# Altium PCB Cube_Mainboard.PcbDoc
Units mm, origin at the board's own origin, x right, y up, seen from the top; angles counter-clockwise.
Board outline 119.89 x 137.16 mm, 2 copper layers (Top Layer, Bottom Layer); 85 components, 135 nets, 378 pads, 9 vias.
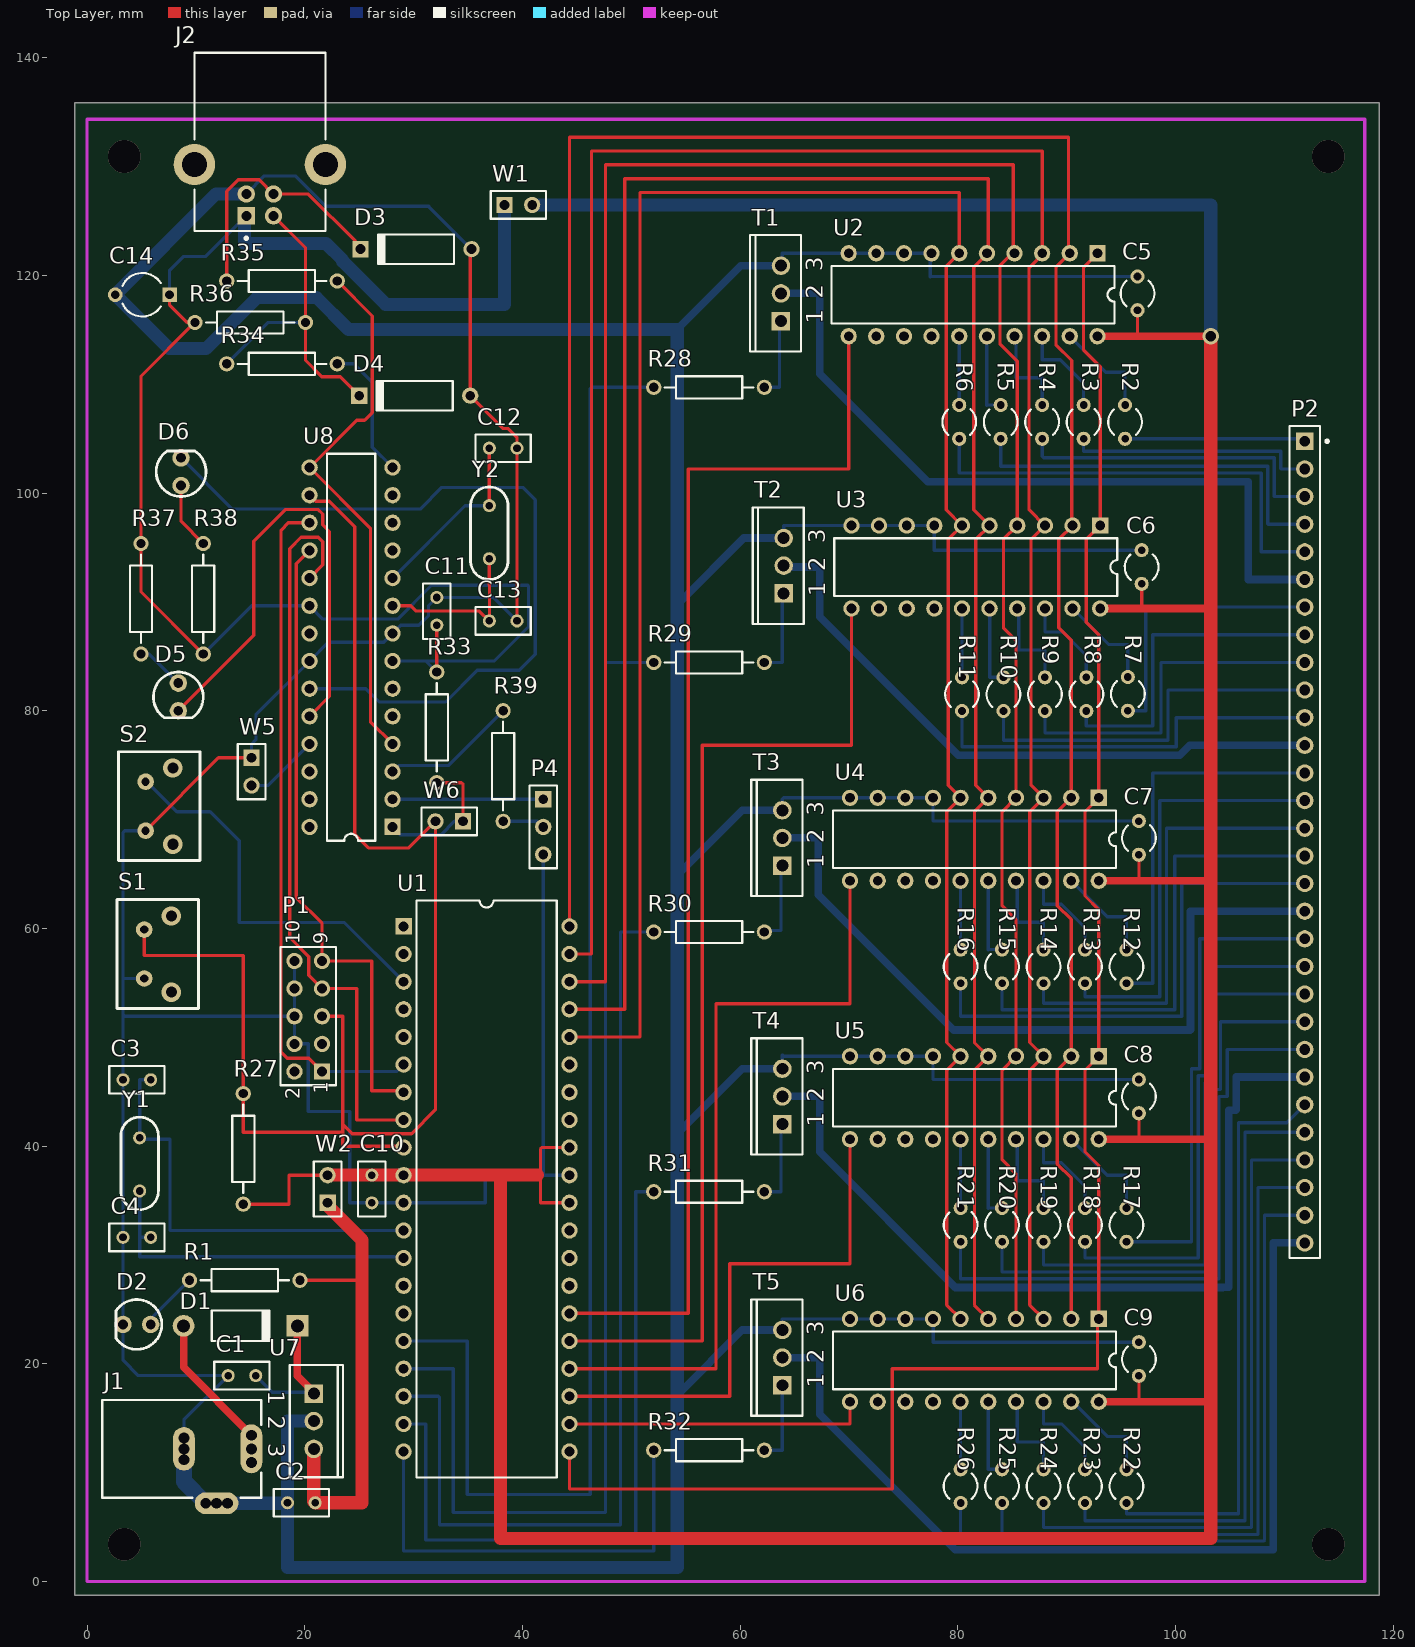
[diagram p0: Top Layer view]
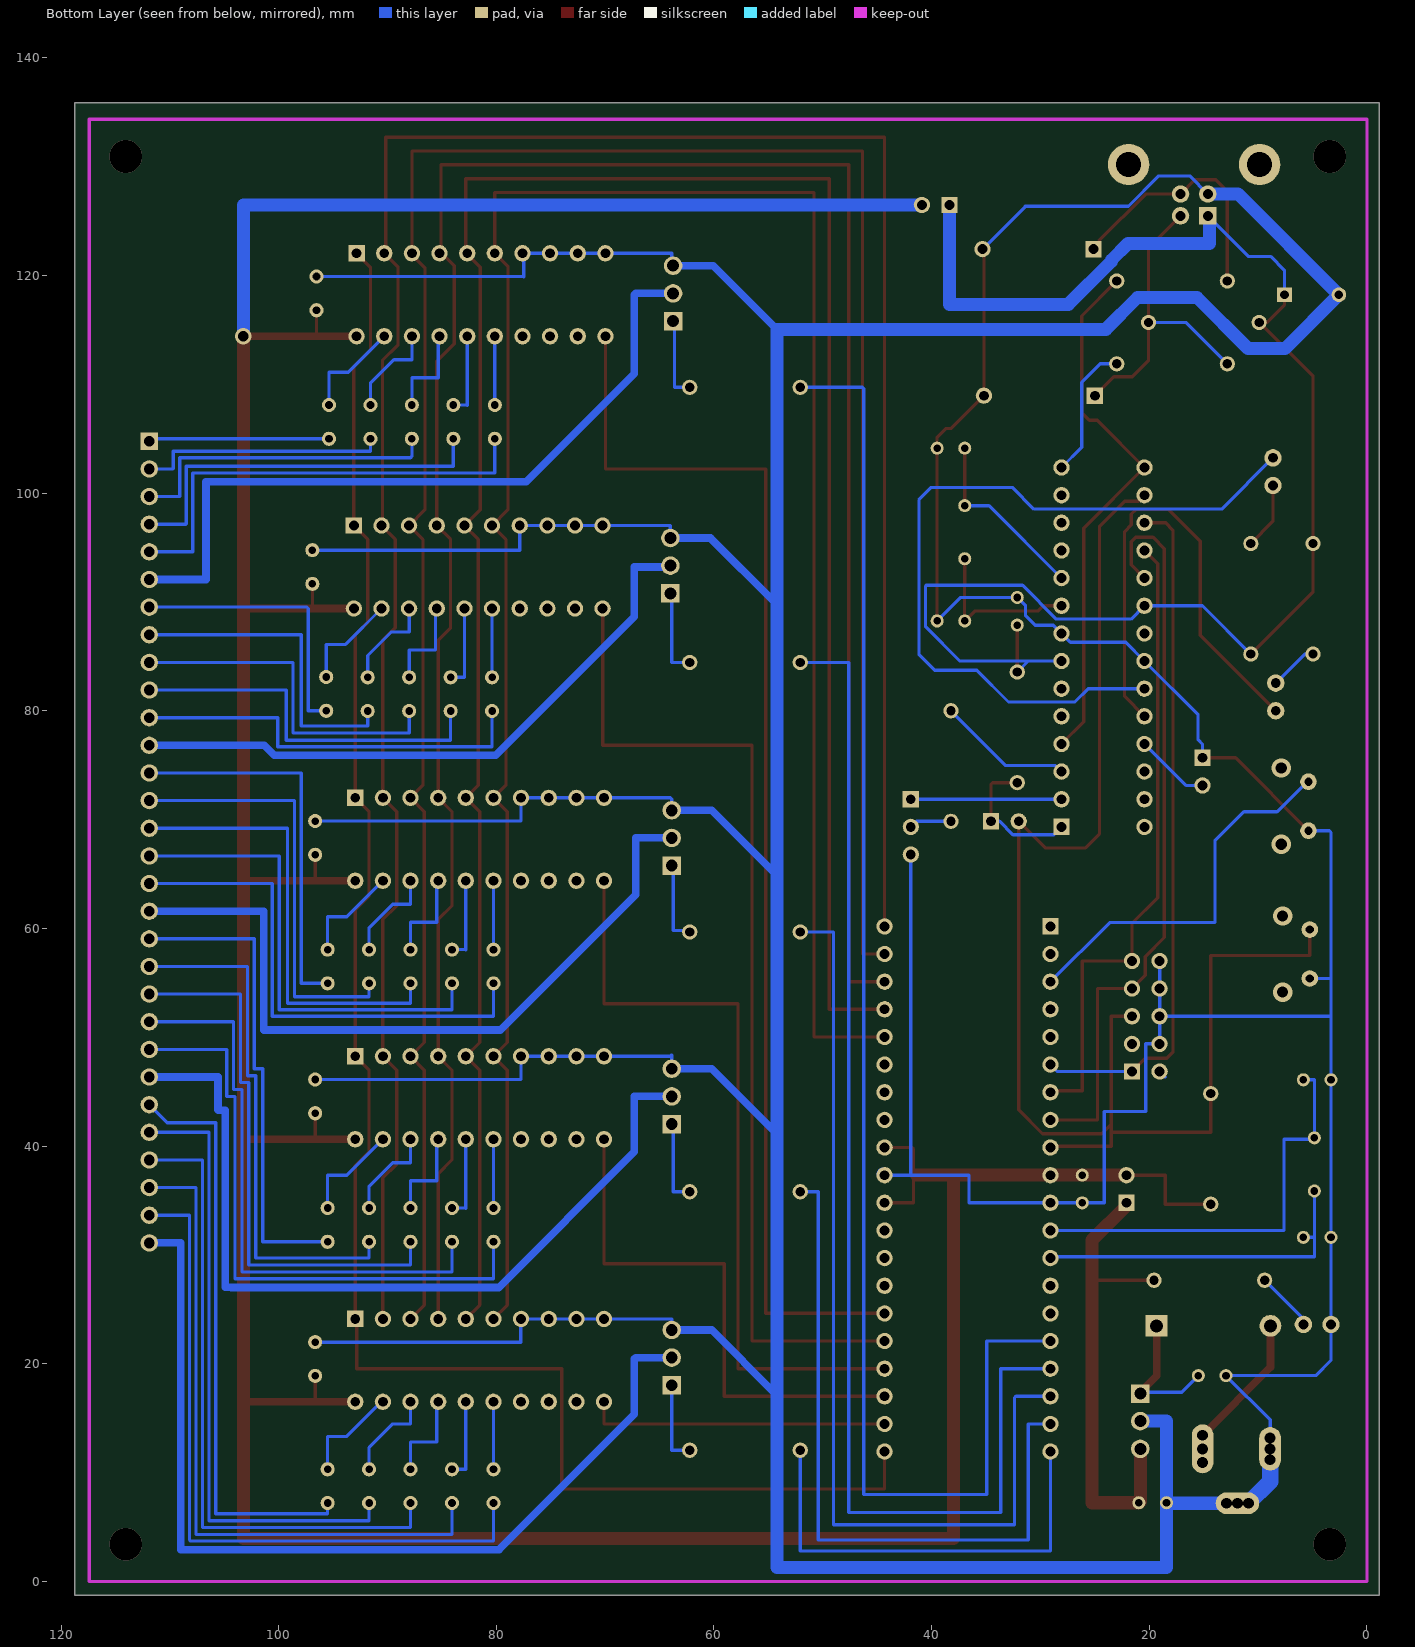
[diagram p1: Bottom Layer view, seen from below]

## Layer stack, top to bottom
Top Layer: signal copper 0.0356
Dielectric: dielectric 0.32, FR-4, Dk 4.8
Bottom Layer: signal copper 0.0356

## Board outline
-1.143,-1.27 -1.143,135.89 118.745,135.89 118.745,-1.27

## Design rules (kind name [scope] priority, off if disabled: settings)
Clearance [All] p1: gap=0.3
PolygonConnect [All] p1: connectstyle=Relief reliefconductorwidth=0.254 reliefentries=4 polygonreliefangle="90 Angle"
RoutingVias [All] p1: holewidth=0.8 width=1.6 viastyle="Through Hole" minholewidth=0.711 minwidth=1.27 maxholewidth=0.711 maxwidth=1.27
SilkscreenOverComponentPads [All] p1: minsilkscreentomaskgap=0.254
SolderMaskExpansion [All] p1: expansion=0.102
Width [All] p1: maxlimit=1.5 minlimit=0.3 preferedwidth=0.3
27 further rules are at their usual default settings.

## Classes and differential pairs
component class U_LED_Treiber: C5 C6 C7 C8 C9 P2 R2 R3 R4 R5 R6 R7 R8 R9 R10 R11 R12 R13 R14 R15 R16 R17 R18 R19 R20 R21 R22 R23 R24 R25 R26 U2 U3 U4 U5 U6
component class U_LED_GND_ZLayer_switch: R28 R29 R30 R31 R32 T1 T2 T3 T4 T5
component class U_Cube_Controller: C1 C2 C3 C4 C10 D1 D2 J1 P1 R1 R27 S1 S2 U1 U7 W1 W2 Y1
component class U_Cube_Conector: E0 E1 E2 E3 E4
component class U_USB_Programmer: C11 C12 C13 C14 D3 D4 D5 D6 J2 P4 R33 R34 R35 R36 R37 R38 R39 U8 W5 W6 Y2

## Components (designator, comment, footprint, x,y, rotation, side; value= is the part's Value field where it differs from the comment)
C1 "Cap2" RAD-0.1 14.224,18.923 r180 top
C2 "Cap2" RAD-0.1 19.685,7.239 r180 top
C3 "Cap Semi" RAD-0.1 4.572,46.101 r0 top
C4 "Cap Semi" RAD-0.1 4.572,31.623 r0 top
C5 "Cap" R38 96.52,118.364 r0 top
C6 "Cap" R38 96.901,93.218 r0 top
C7 "Cap" R38 96.647,68.326 r0 top
C8 "Cap" R38 96.647,44.577 r0 top
C9 "Cap" R38 96.647,20.447 r0 top
C10 "Cap" RAD-0.1 26.162,36.068 r90 top
C11 "Cap" RAD-0.1 32.131,89.154 r270 top
C12 "Cap" RAD-0.1 38.227,104.14 r180 top
C13 "Cap" RAD-0.1 38.227,88.265 r180 top
C14 "Cap2" CAPR5-4X5 5.08,118.237 r180 top
D1 "Diode 1N4004" DO-41 14.097,23.495 r0 top
D2 "LED" "LED 3mm" 5.842,23.622 r180 top
D3 "3V6" DO-7 30.226,122.428 r180 top
D4 "3V6" DO-7 30.099,108.966 r180 top
D5 "LED" "LED 3mm" 8.382,82.55 r270 top
D6 "LED" "LED 3mm" 8.636,100.711 r90 top
J1 "PWR2.5" KLD-0202 1.397,12.192 r0 top
J2 "4-1437106-7" 1437106 15.875,126.492 r90 top
P1 "Header 5X2" HDR2X5 21.59,46.863 r90 top
P2 "Header 30" HDR1X30 111.887,104.775 r270 top
P4 "Header 3" HDR1X3 41.91,71.882 r270 top
R1 "Res2" AXIAL-0.4 14.478,27.686 r180 top
R2 "Res2" R38 95.377,106.553 r0 top
R3 "Res2" R38 91.567,106.553 r0 top
R4 "Res2" R38 87.757,106.553 r0 top
R5 "Res2" R38 83.947,106.553 r0 top
R6 "Res2" R38 80.137,106.553 r0 top
R7 "Res2" R38 95.631,81.56 r0 top
R8 "Res2" R38 91.821,81.534 r0 top
R9 "Res2" R38 88.011,81.534 r0 top
R10 "Res2" R38 84.201,81.534 r0 top
R11 "Res2" R38 80.391,81.534 r0 top
R12 "Res2" R38 95.504,56.515 r0 top
R13 "Res2" R38 91.694,56.515 r0 top
R14 "Res2" R38 87.884,56.515 r0 top
R15 "Res2" R38 84.074,56.515 r0 top
R16 "Res2" R38 80.264,56.515 r0 top
R17 "Res2" R38 95.504,32.766 r0 top
R18 "Res2" R38 91.694,32.766 r0 top
R19 "Res2" R38 87.884,32.766 r0 top
R20 "Res2" R38 84.074,32.766 r0 top
R21 "Res2" R38 80.264,32.766 r0 top
R22 "Res2" R38 95.504,8.763 r0 top
R23 "Res2" R38 91.694,8.763 r0 top
R24 "Res2" R38 87.884,8.763 r0 top
R25 "Res2" R38 84.074,8.763 r0 top
R26 "Res2" R38 80.264,8.763 r0 top
R27 "Res2" AXIAL-0.4 14.351,39.751 r90 top
R28 "Res2" AXIAL-0.4 57.15,109.728 r0 top
R29 "Res2" AXIAL-0.4 57.15,84.455 r0 top
R30 "Res2" AXIAL-0.4 57.15,59.69 r0 top
R31 "Res2" AXIAL-0.4 57.15,35.814 r0 top
R32 "Res2" AXIAL-0.4 57.15,12.065 r0 top
R33 "Res2" AXIAL-0.4 32.131,78.486 r270 top
R34 "Res2" AXIAL-0.4 17.907,111.887 r180 top
R35 "Res2" AXIAL-0.4 17.907,119.507 r180 top
R36 "Res2" AXIAL-0.4 14.986,115.697 r180 top
R37 "Res2" AXIAL-0.4 4.953,90.297 r90 top
R38 "Res2" AXIAL-0.4 10.668,90.297 r270 top
R39 "Res2" AXIAL-0.4 38.227,74.93 r270 top
S1 "Taster" Taster 7.747,57.658 r0 top
S2 "Taster" Taster 7.874,71.247 r0 top
T1 "BUZ11" TO220 63.754,118.364 r90 top
T2 "BUZ11" TO220 64.008,93.345 r90 top
T3 "BUZ11" TO220 63.881,68.326 r90 top
T4 "BUZ11" TO220 63.881,44.577 r90 top
T5 "BUZ11" TO220 63.881,20.574 r90 top
U1 "ATmega32L-8PI" 40P6 36.703,36.068 r270 top
U2 "M74HC574B1R" DIP20 81.407,118.237 r180 top
U3 "M74HC574B1R" DIP20 81.661,93.218 r180 top
U4 "M74HC574B1R" DIP20 81.534,68.199 r180 top
U5 "M74HC574B1R" DIP20 81.534,44.45 r180 top
U6 "M74HC574B1R" DIP20 81.534,20.32 r180 top
U7 "MC78T05ABT" 221A-04 20.828,14.732 r270 top
U8 "ATmega8L-8PI" 28P3 24.257,85.852 r90 top
W1 "Jumper" HDR1X2 38.354,126.492 r0 top
W2 "Jumper" HDR1X2 22.098,34.798 r90 top
W5 "Jumper" HDR1X2 15.113,75.692 r270 top
W6 "Jumper" HDR1X2 34.544,69.85 r180 top
Y1 "16MHz" "Quarz HC49-4HL" 4.826,40.767 r270 top
Y2 "12MHz" "Quarz HC49-4HL" 36.957,93.98 r90 top

## Footprints (in the part's own frame and the unit in brackets; to place one, negate y for a bottom-side part, rotate by r counter-clockwise, add the part's x,y. Pads: shape width x height; smd on the part's side, far side on the other; paste and mask are expansions set on the pad)
28P3 [mm] "DIP; 28 Leads; Row Spacing 7.62 mm; Pitch 2.54 mm"
  rect 1.5x1.5 hole 0.9: 1(-16.51,-3.81)
  round 1.5 hole 0.9: 2(-13.97,-3.81) 3(-11.43,-3.81) 4(-8.89,-3.81) 5(-6.35,-3.81) 6(-3.81,-3.81) 7(-1.27,-3.81) 8(1.27,-3.81) 9(3.81,-3.81) 10(6.35,-3.81) 11(8.89,-3.81) 12(11.43,-3.81) 13(13.97,-3.81) 14(16.51,-3.81) 15(16.51,3.81) 16(13.97,3.81) 17(11.43,3.81) 18(8.89,3.81) 19(6.35,3.81) 20(3.81,3.81) 21(1.27,3.81) 22(-1.27,3.81) 23(-3.81,3.81) 24(-6.35,3.81) 25(-8.89,3.81) 26(-11.43,3.81) 27(-13.97,3.81) 28(-16.51,3.81)
  silkscreen extent -17.78,-2.22 17.78,2.22
40P6 [mm] "DIP; 40 Leads; Row Spacing 15.24 mm; Pitch 2.54 mm"
  rect 1.5x1.5 hole 0.9: 1(-24.13,-7.62)
  round 1.5 hole 0.9: 2(-21.59,-7.62) 3(-19.05,-7.62) 4(-16.51,-7.62) 5(-13.97,-7.62) 6(-11.43,-7.62) 7(-8.89,-7.62) 8(-6.35,-7.62) 9(-3.81,-7.62) 10(-1.27,-7.62) 11(1.27,-7.62) 12(3.81,-7.62) 13(6.35,-7.62) 14(8.89,-7.62) 15(11.43,-7.62) 16(13.97,-7.62) 17(16.51,-7.62) 18(19.05,-7.62) 19(21.59,-7.62) 20(24.13,-7.62) 21(24.13,7.62) 22(21.59,7.62) 23(19.05,7.62) 24(16.51,7.62) 25(13.97,7.62) 26(11.43,7.62) 27(8.89,7.62) 28(6.35,7.62) 29(3.81,7.62) 30(1.27,7.62) 31(-1.27,7.62) 32(-3.81,7.62) 33(-6.35,7.62) 34(-8.89,7.62) 35(-11.43,7.62) 36(-13.97,7.62) 37(-16.51,7.62) 38(-19.05,7.62) 39(-21.59,7.62) 40(-24.13,7.62)
  silkscreen extent -26.5,-6.45 26.5,6.45
221A-04 [mm] "TO, Thru-Hole, Vertical, Heatsink Mounted; 3 In-Line Leads; Pitch 2.54 mm"
  rect 1.7x1.7 hole 1.1: 1(-2.54,0)
  round 1.7 hole 1.1: 2(0,0) 3(2.54,0)
  silkscreen extent -5.15,-2.2 5.15,2.7
1437106 [mm] "Connector; USB1.1, Type B, Thru-Hole; 4 Position; Right Angle"
  rect 1.6x1.6 hole 0.92: 1(-1,1.25)
  round 1.6 hole 0.92: 2(-1,-1.25) 3(1,-1.25) 4(1,1.25)
  round 3.8 hole 2.3: 5(3.71,6.02) 6(3.71,-6.02)
  silkscreen extent -3.18,-6.02 13.99,6.02
AXIAL-0.4 [mm] "Axial Device, Thru-Hole; 2 Leads; 0.4 in Pin Spacing"
  round 1.4 hole 0.85: 1(-5.08,0) 2(5.08,0)
  silkscreen extent -4.06,-1.02 4.06,1.02
CAPR5-4X5 [mm] "Capacitor; 2 Leads"
  rect 1.35x1.35 hole 0.8: 1(-2.5,0)
  round 1.35 hole 0.8: 2(2.5,0)
  silkscreen extent -1.69,-2 1.82,2
DIP20 [mm] "DIP; 20 Leads; Row Spacing 7.62 mm; Pitch 2.54 mm"
  rect 1.5x1.5 hole 0.9: 1(-11.43,-3.81)
  round 1.5 hole 0.9: 2(-8.89,-3.81) 3(-6.35,-3.81) 4(-3.81,-3.81) 5(-1.27,-3.81) 6(1.27,-3.81) 7(3.81,-3.81) 8(6.35,-3.81) 9(8.89,-3.81) 10(11.43,-3.81) 11(11.43,3.81) 12(8.89,3.81) 13(6.35,3.81) 14(3.81,3.81) 15(1.27,3.81) 16(-1.27,3.81) 17(-3.81,3.81) 18(-6.35,3.81) 19(-8.89,3.81) 20(-11.43,3.81)
  silkscreen extent -13,-2.65 13,2.65
DO-7 [mm] "Diode, Axial; Body 7 x 2.7 mm (LxDia. max), Lead Dia. 0.53 mm (max)"
  round 1.5 hole 0.9: 1(-5.1,0)
  rect 1.5x1.5 hole 0.9: 2(5.1,0)
  silkscreen extent -3.5,-1.35 3.6,1.35
DO-41 [mm] "Diode, Axial; Body 5.2 x 2.7 mm (LxDia. max), Lead Dia. 0.86 mm (max)"
  round 2 hole 1.2: 1(-5.23,0)
  rect 2x2 hole 1.2: 2(5.23,0)
  silkscreen extent -2.65,-1.4 2.75,1.4
HDR1X2 [mm] "Connector; Header; 2 Position"
  rect 1.5x1.5 hole 0.9: 1(0,0)
  round 1.5 hole 0.9: 2(2.54,0)
  silkscreen extent -1.27,-1.27 3.81,1.27
HDR1X3 [mm] "Connector; Header; 3 Position"
  rect 1.5x1.5 hole 0.9: 1(0,0)
  round 1.5 hole 0.9: 2(2.54,0) 3(5.08,0)
  silkscreen extent -1.27,-1.27 6.35,1.27
HDR1X30 [mm] "Connector; Header; 30 Position"
  rect 1.6x1.6 hole 0.99: 1(0,0)
  round 1.6 hole 0.99: 2(2.54,0) 3(5.08,0) 4(7.62,0) 5(10.16,0) 6(12.7,0) 7(15.24,0) 8(17.78,0) 9(20.32,0) 10(22.86,0) 11(25.4,0) 12(27.94,0) 13(30.48,0) 14(33.02,0) 15(35.56,0) 16(38.1,0) 17(40.64,0) 18(43.18,0) 19(45.72,0) 20(48.26,0) 21(50.8,0) 22(53.34,0) 23(55.88,0) 24(58.42,0) 25(60.96,0) 26(63.5,0) 27(66.04,0) 28(68.58,0) 29(71.12,0) 30(73.66,0)
  silkscreen extent -1.4,-1.4 75.06,2.18
HDR2X5 [mm] "Connector; Header; 5x2 Position"
  rect 1.5x1.5 hole 0.9: 1(0,0)
  round 1.5 hole 0.9: 2(0,2.54) 3(2.54,0) 4(2.54,2.54) 5(5.08,0) 6(5.08,2.54) 7(7.62,0) 8(7.62,2.54) 9(10.16,0) 10(10.16,2.54)
  silkscreen extent -1.27,-1.27 11.43,3.81
KLD-0202 [mm] "DC Power Jack, 2.5mm, KLD Series, PCB Mount"
  oval 2x4.5 hole 1: 1(13.7,0)
  round 1.5 hole 1: 1A(13.7,-1.25) 1B(13.7,1.25) 2A(7.5,-1) 2B(7.5,1) 3A(9.5,-5) 3B(11.5,-5)
  oval 2x4 hole 1: 2(7.5,0)
  oval 4x2 hole 1: 3(10.5,-5)
  silkscreen extent 0,-4.5 14.6,4.5
"LED 3mm" [mm]
  round 1.6 hole 0.9: 1(0,0) 2(2.54,0)
  silkscreen extent -1.02,-2.29 3.18,2.29
"Quarz HC49-4HL" [mm]
  round 1.2 hole 0.7: 1(0,0) 2(4.88,0)
  silkscreen extent -1.9,-1.72 6.6,1.72
R38 [mm] "Crystal, Thru-Hole; 2 Leads; Body 3.1 x 8.2 mm (Dia.xH)"
  round 1.3 hole 0.7: 1(0,1.55) 2(0,-1.55)
  silkscreen extent -1.55,-1.19 1.55,1.17
RAD-0.1 [mm] "Radial Cap, Thru-Hole; 2 Leads; 0.1 in Pin Spacing"
  round 1.2 hole 0.7: 1(-1.27,0) 2(1.27,0)
  silkscreen extent -2.54,-1.27 2.54,1.27
Taster [mil]
  round 60 hole 30: 1(-98.43,88.58) 2(-98.43,-88.58)
  silkscreen extent -197,-197 98,197
TO220 [mm] "TO, Thru-Hole, Vertical, Heatsink Mounted; 3 In-Line Leads; Pitch 2.54 mm"
  rect 1.7x1.7 hole 1.1: 1(-2.54,0)
  round 1.7 hole 1.1: 2(0,0) 3(2.54,0)
  silkscreen extent -5.35,-1.85 5.35,2.85

## Part data
C1 C2 C5 C6 C7 C8 C9 C10 C11 C12 C13 C14: "Capacitor"
C3 C4: "Capacitor (Semiconductor SIM Model)"
D1: "1 Amp General Purpose Rectifier"
D2 D5 D6: library part "LED Std", "LED bedrahtet"
D3 D4: library part "D Zener", "Zener Diode"
J1: "Low Voltage Power Supply Connector"
J2: "USB 1.1, Right Angle, Thru-Hole, B Type, Receptacle, 4 Position, White"
P1: "Header, 5-Pin, Dual row"
P2: "Header, 30-Pin"
P4: "Header, 3-Pin"
R1 R2 R3 R4 R5 R6 R7 R8 R9 R10 R11 R12 R13 R14 R15 R16 R17 R18 R19 R20 R21 R22 R23 R24 R25 R26 R27 R28 R29 R30 R31 R32 R33 R34 R35 R36 R37 R38 R39: "Resistor"
T1 T2 T3 T4 T5: library part N-MOSFET, "MOSFET"
U1: "8-Bit AVR Microcontroller with 32K Bytes of In-System Programmable Flash Memory"
U2 U3 U4 U5 U6: "Octal D-Type Flip-Flop with 3-State Output Non-Inverting"
U7: "Three-Ampere Positive Fixed Voltage Regulator"
U8: "8-Bit AVR Microcontroller with 8K Bytes of In-System Programmable Flash Memory"
W1 W2 W5 W6: "Jumper Wire"
Y1 Y2: library part "Quarz HC49-4HL"

## Via types
v1: diameter 3, hole 3, Top Layer to Bottom Layer, 4 vias
v2: diameter 1.778, hole 1.016, Top Layer to Bottom Layer, 4 vias
v3: diameter 1.5, hole 1, Top Layer to Bottom Layer, 1 vias

## Nets (pads, with @x,y where several pads share a name; then routed paths per layer and width w, separated by ;. In a path a pad name is that pad's centre, name@x,y a point inside that pad or via, vN(x,y) a via of type N, cw(c..) or ccw(c..) an arc to the next point about the centre after c; other vN are vias at no path point)
+5: C2.1 R1.1 U7.3 W2.1 | length 44
  Top Layer w0.3: R1.1 25.146,27.686 25.273,27.813
  Top Layer w1.2: U7.3 20.828,7.366 C2.1 25.273,7.239 25.273,27.813 25.273,31.369 22.098,34.544 W2.1
+5P: C11.2 C14.1 J2.1 R33.1 R36.2 R37.2 R38.2 U8.7 U8.20 W1.1 | length 144.9
  Top Layer w0.3: C14.1 7.58,117.29 9.173,115.697 R36.2 4.953,110.744 R37.2 4.953,90.932 R38.2 ; R33.1 C11.2
  Bottom Layer w0.3: C14.1 7.58,120.483 8.86,121.763 10.896,121.763 14.478,125.345 J2.1 ; R38.2 15.113,89.662 U8.20 21.671,88.438 28.545,88.438 31.644,91.537 40.483,91.537 40.559,91.461 40.559,87.727 37.414,84.582 31.115,84.582 ; U8.7 31.115,84.582 ; R33.1 31.115,84.582
  Bottom Layer w1.2: J2.1@14.478,125.345 14.478,122.936 21.971,122.936 23.476,121.431 23.476,121.305 27.433,117.348 38.354,117.348 W1.1
GND: C1.2 C2.2 C3.1 C4.1 C5.1 C6.1 C7.1 C8.1 C9.1 C10.1 C11.1 C12.1 C13.1 C14.2 D2.2 D3.1 D4.1 J1.2 J1.2A J1.2B J1.3 J1.3A J1.3B J2.4 P1.4 P1.6 P1.8 P1.10 P4.3 S1.2 S2.2 T1.3 T2.3 T3.3 T4.3 T5.3 U1.11 U1.31 U2.7 U2.8 U2.9 U2.10 U3.7 U3.8 U3.9 U3.10 U4.7 U4.8 U4.9 U4.10 U5.7 U5.8 U5.9 U5.10 U6.7 U6.8 U6.9 U6.10 U7.2 U8.8 U8.22 W5.1 | length 763.2
  Top Layer w0.3: S2.2 12.069,75.692 W5.1 ; D3.1@35.199,122.174 D4.1 38.226,105.939 38.705,105.939 39.497,105.147 C12.1 C13.1
  Bottom Layer w0.3: S1.2 3.393,55.408 3.302,55.499 ; S2.2 3.465,68.997 3.302,68.834 3.302,55.499 ; J1.2A J1.2 J1.2B 8.897,14.866 C1.2 4.699,18.923 3.302,20.32 D2.2 C4.1 C3.1 3.302,52.07 ; J2.4 16.287,129.154 19.122,129.154 21.911,126.365 31.389,126.365 ; W5.1 15.113,76.932 15.515,77.334 15.515,79.65 U8.22 22.17,86.305 27.25,86.305 U8.8 28.807,87.862 30.481,87.862 31.369,88.75 31.369,89.662 C11.1 37.338,90.424 C13.1 ; P1.10 P1.8 P1.6 ; 31.443,126.291 D3.1@35.316,122.418 ; P4.3 41.91,37.338 ; U1.31 41.91,37.338 ; T1.3 63.881,121.031 63.881,122.047 U2.10 U2.9 U2.8 U2.7 77.47,121.92 77.47,119.888 77.496,119.914 C5.1 ; T5.3 63.881,24.13 U6.10 U6.9 U6.8 U6.7 ; T4.3 63.881,48.387 64.008,48.26 U5.10 U5.9 U5.8 U5.7 77.724,46.127 C8.1 ; T3.3 63.881,71.882 64.008,72.009 U4.10 U4.9 U4.8 U4.7 77.724,69.876 C7.1 ; T2.3 64.008,97.028 U3.10 U3.9 U3.8 U3.7 77.851,94.742 77.877,94.768 C6.1 ; U6.7@77.75,24.156 77.75,21.997 C9.1 ; 3.302,52.07 3.429,51.943 P1.6 ; 3.302,52.07 3.302,55.499 ; P1.6 P1.4 20.32,49.403 20.32,43.18 24.13,43.18 24.13,34.798 C10.1 U1.11 36.576,34.798 36.576,37.338 41.91,37.338
  Bottom Layer w0.7: 54.229,115.062 60.071,120.904 T1.3 ; 54.356,17.272 60.198,23.114 T5.3 ; 54.356,41.275 60.198,47.117 T4.3 ; 54.356,65.024 60.198,70.866 T3.3 ; 54.483,90.043 60.325,95.885 T2.3
  Bottom Layer w1.2: J1.3B C2.2@18.415,7.192 ; J2.4 11.835,127.492 C14.2 7.533,113.284 10.922,113.284 15.621,117.983 21.082,117.983 24.003,115.062 54.229,115.062 54.229,1.27 18.415,1.27 C2.2@18.415,7.192 ; U7.2 18.415,14.732 C2.2 C2.2@18.415,7.192 ; U1.31 U1.31@44.45,37.465
  Bottom Layer w1.5: J1.2A 8.897,9.192 J1.3A
Net00_1: 
Net00_2: 
Net01_1: 
Net02_1: 
Net03_1: 
Net04_1: 
Net10_1: 
Net11_1: 
Net12_1: 
Net13_1: 
Net14_1: 
Net20_1: 
Net21_1: 
Net22_1: 
Net23_1: 
Net24_1: 
Net30_1: 
Net31_1: 
Net32_1: 
Net33_1: 
Net34_1: 
Net40_1: 
Net41_1: 
Net42_1: 
Net43_1: 
Net44_1: 
NetC1_1: C1.1 D1.2 U7.1 | length 12.7
  Top Layer w0.7: D1.2 19.327,18.9 U7.1@20.828,17.399
  Bottom Layer w0.3: C1.1 17.018,17.399 U7.1@20.828,17.399
NetC3_2: C3.2 U1.12 Y1.1 | length 39
  Bottom Layer w0.3: C3.2 4.826,46.101 Y1.1 4.953,40.64 7.62,40.64 7.62,32.258 U1.12
NetC4_2: C4.2 U1.13 Y1.2 | length 31.4
  Bottom Layer w0.3: Y1.2 4.826,31.623 ; C4.2 4.826,31.623 ; U1.13 28.956,29.845 4.826,29.845 4.826,31.623
NetC12_2: C12.2 U8.10 Y2.2 | length 16.9
  Top Layer w0.3: Y2.2 36.952,98.865 36.952,104.135 C12.2
  Bottom Layer w0.3: U8.10 34.725,98.86 Y2.2
NetC13_2: C13.2 U8.9 Y2.1 | length 15.2
  Top Layer w0.3: U8.9 29.76,89.662 30.247,89.175 36.047,89.175 C13.2 36.978,88.265 36.978,91.562 36.957,91.583 Y2.1
NetD1_1: D1.1 J1.1 J1.1A J1.1B | length 12.6
  Top Layer w0.7: D1.1 8.867,19.672 J1.1B
NetD2_1: D2.1 R1.2 | length 5.5
  Bottom Layer w0.3: D2.1 5.842,24.13 R1.2
NetD3_2: D3.2 J2.3 R35.2 | length 22.8
  Top Layer w0.3: R35.2 12.827,127.732 13.894,128.799 15.818,128.799 J2.3 20.316,127.492 24.628,123.18
NetD4_2: D4.2 J2.2 R34.2 R36.1 | length 29.6
  Top Layer w0.3: J2.2 20.066,122.551 R36.1 20.066,112.208 21.56,110.714 23.251,110.714 D4.2
  Bottom Layer w0.3: R34.2 16.637,115.697 R36.1
NetD5_1: D5.1 R37.1 | length 4.5
  Bottom Layer w0.3: R37.1 5.715,85.217 D5.1
NetD5_2: D5.2 U8.24 | length 45.8
  Top Layer w0.3: D5.2 15.312,86.94 15.312,95.601 18.207,98.497 21.242,98.497 21.647,98.092 21.647,97.089 22.271,96.465 22.271,81.326 U8.24
NetD6_1: D6.1 R38.1 | length 6.2
  Top Layer w0.3: D6.1 8.636,97.409 R38.1
NetD6_2: D6.2 U8.23 | length 73
  Bottom Layer w0.3: D6.2 13.34,98.547 30.602,98.547 32.584,100.529 40.026,100.529 41.169,99.386 41.169,85.187 39.721,83.739 35.86,83.739 32.939,80.818 26.843,80.818 25.619,82.042 U8.23
NetE0_1: 
NetE1_1: 
NetE2_1: 
NetE3_1: 
NetP1_1: P1.1 U1.6 U8.17 | length 63.1
  Top Layer w0.3: U8.17 18.491,97.282 17.826,96.617 17.826,48.636 18.385,48.078 20.375,48.078 P1.1
  Bottom Layer w0.3: P1.1 28.448,46.863 U1.6
NetP1_5: P1.5 R27.2 S1.1 U1.9 U8.16 W6.2 | length 143.1
  Top Layer w0.3: S1.1 5.247,57.531 14.351,57.531 R27.2 14.351,41.275 23.495,41.275 23.495,40.005 28.956,40.005 U1.9 ; U8.16 21.001,99.268 22.247,99.268 24.583,96.932 24.583,68.677 25.853,67.407 29.561,67.407 W6.2 32.004,43.332 29.815,41.143 24.354,41.143 23.495,42.002 ; P1.5 23.495,51.943 23.495,42.002 ; 23.49,50.043 23.49,42.007 23.495,42.002 ; 23.495,41.402 23.495,42.002
NetP1_7: P1.7 U1.8 U8.19 | length 68.7
  Top Layer w0.3: U8.19 21.662,93.417 21.662,95.537 21.242,95.957 19.655,95.957 18.614,94.915 18.614,59.177 20.366,57.425 20.366,55.707 P1.7 24.765,54.483 24.765,42.418 U1.8
NetP1_9: P1.9 U1.7 U8.18 | length 58.7
  Top Layer w0.3: U8.18 19.223,93.518 19.223,62.835 21.59,60.468 P1.9 26.162,57.023 26.162,45.085 28.956,45.085 U1.7
NetP2_1: P2.1 R2.2 | length 16.6
  Bottom Layer w0.3: R2.2 111.659,105.003 P2.1
NetP2_2: P2.2 R3.2 | length 23.1
  Bottom Layer w0.3: R3.2 91.567,103.851 109.693,103.851 109.693,102.27 109.728,102.235 P2.2
NetP2_3: P2.3 R4.2 | length 29.4
  Bottom Layer w0.3: R4.2 87.757,103.378 87.884,103.251 109.093,103.251 109.093,99.695 P2.3
NetP2_4: P2.4 R5.2 | length 35.8
  Bottom Layer w0.3: R5.2 83.947,102.489 108.493,102.489 108.493,97.19 108.528,97.155 P2.4
NetP2_5: P2.5 R6.2 | length 42.1
  Bottom Layer w0.3: R6.2 80.137,101.854 107.893,101.854 107.893,94.615 P2.5
NetP2_6: P2.6 T1.2 | length 68.4
  Bottom Layer w0.7: T1.2 67.183,118.364 67.31,118.237 67.31,110.998 77.254,101.054 106.68,101.054 106.68,92.075 P2.6@111.76,92.075
NetP2_7: P2.7 R7.2 | length 25.7
  Bottom Layer w0.3: R7.2 97.282,80.01 97.282,89.408 97.409,89.535 P2.7
NetP2_8: P2.8 R8.2 | length 29.8
  Bottom Layer w0.3: R8.2 91.821,78.613 97.917,78.613 97.917,86.995 P2.8
NetP2_9: P2.9 R9.2 | length 32.4
  Bottom Layer w0.3: R9.2 88.011,77.978 98.679,77.978 98.679,84.455 P2.9
NetP2_10: P2.10 R10.2 | length 35
  Bottom Layer w0.3: R10.2 84.201,77.308 99.314,77.308 99.314,81.915 P2.10
NetP2_11: P2.11 R11.2 | length 37.4
  Bottom Layer w0.3: R11.2 80.391,76.708 100.076,76.708 100.076,79.375 P2.11
NetP2_12: P2.12 T2.2 | length 58.2
  Bottom Layer w0.7: T2.2 64.135,93.218 67.31,93.218 67.31,88.646 80.048,75.908 100.407,75.908 101.334,76.835 P2.12
NetP2_13: P2.13 R12.2 | length 35.7
  Bottom Layer w0.3: R12.2 97.917,54.965 97.917,74.295 P2.13
NetP2_14: P2.14 R13.2 | length 39.4
  Bottom Layer w0.3: R13.2 91.694,53.743 98.552,53.743 98.552,71.755 P2.14
NetP2_15: P2.15 R14.2 | length 41.9
  Bottom Layer w0.3: R14.2 87.884,53.143 99.187,53.143 99.187,69.215 P2.15
NetP2_16: P2.16 R15.2 | length 44.4
  Bottom Layer w0.3: R15.2 84.074,52.543 99.949,52.543 99.949,66.675 P2.16
NetP2_17: P2.17 R16.2 | length 46.8
  Bottom Layer w0.3: R16.2 80.264,51.943 100.584,51.943 100.584,64.135 P2.17
NetP2_18: P2.18 T3.2 | length 69.3
  Bottom Layer w0.7: T3.2 67.183,68.326 67.183,63.119 79.629,50.673 101.346,50.673 101.384,50.711 101.384,61.595 P2.18
NetP2_19: P2.19 R17.2 | length 44.2
  Bottom Layer w0.3: R17.2 101.473,31.216 101.473,47.117 102.235,47.117 102.235,59.055 P2.19
NetP2_20: P2.20 R18.2 | length 48.5
  Bottom Layer w0.3: R18.2 91.694,29.718 102.108,29.718 102.108,46.482 102.87,46.482 102.87,56.515 P2.20
NetP2_21: P2.21 R19.2 | length 51
  Bottom Layer w0.3: R19.2 87.884,29.083 102.743,29.083 102.743,45.847 103.505,45.847 103.505,53.975 P2.21
NetP2_22: P2.22 R20.2 | length 53.6
  Bottom Layer w0.3: R20.2 84.074,28.448 103.378,28.448 103.378,45.212 104.14,45.212 104.14,51.435 P2.22
NetP2_23: P2.23 R21.2 | length 56.1
  Bottom Layer w0.3: R21.2 80.264,27.813 104.013,27.813 104.013,44.577 104.775,44.577 104.775,48.895 P2.23
NetP2_24: P2.24 T4.2 | length 77.6
  Bottom Layer w0.7: T4.2 67.31,44.577 67.31,39.497 79.794,27.013 104.344,27.013 104.382,27.051 104.902,27.051 104.902,43.307 105.537,43.307 105.575,43.345 105.575,46.355 P2.24
NetP2_25: P2.25 R22.2 | length 54
  Bottom Layer w0.3: R22.2 95.504,6.223 105.791,6.223 105.791,42.164 110.236,42.164 P2.25
NetP2_26: P2.26 R23.2 | length 57.5
  Bottom Layer w0.3: R23.2 91.694,5.588 106.391,5.588 106.391,41.275 P2.26
NetP2_27: P2.27 R24.2 | length 60
  Bottom Layer w0.3: R24.2 87.884,4.953 106.991,4.953 106.991,38.735 P2.27
NetP2_28: P2.28 R25.2 | length 62.6
  Bottom Layer w0.3: R25.2 84.074,4.318 107.569,4.318 107.591,4.34 107.591,36.195 P2.28
NetP2_29: P2.29 R26.2 | length 65
  Bottom Layer w0.3: R26.2 80.264,3.718 108.099,3.718 108.191,3.81 108.191,33.655 P2.29
NetP2_30: P2.30 T5.2 | length 86.5
  Bottom Layer w0.7: T5.2 67.183,20.574 67.31,20.447 67.31,15.367 79.759,2.918 108.43,2.918 108.433,2.921 108.991,2.921 108.991,31.115 P2.30
NetP4_1: P4.1 U8.2 | length 13.8
  Bottom Layer w0.3: U8.2 P4.1
NetP4_2: P4.2 R39.2 | length 3.9
  Bottom Layer w0.3: R39.2 39.649,69.85 39.67,69.871 41.381,69.871 P4.2
NetR2_1: R2.1 U2.19 | length 9.5
  Bottom Layer w0.3: U2.19 93.599,111.125 95.377,111.125 R2.1
NetR3_1: R3.1 U2.18 | length 8.9
  Bottom Layer w0.3: U2.18 87.757,112.268 89.408,112.268 91.567,110.109 R3.1
NetR4_1: R4.1 U2.17 | length 8.8
  Bottom Layer w0.3: U2.17 85.344,114.3 85.344,110.617 87.757,110.617 R4.1
NetR5_1: R5.1 U2.16 | length 7.6
  Bottom Layer w0.3: U2.16 82.677,108.077 82.703,108.103 R5.1
NetR6_1: R6.1 U2.15 | length 6.3
  Bottom Layer w0.3: R6.1 U2.15
NetR7_1: R7.1 U3.19 | length 9.4
  Bottom Layer w0.3: U3.19 93.853,86.106 95.631,86.106 R7.1
NetR8_1: R8.1 U3.18 | length 8.9
  Bottom Layer w0.3: U3.18 88.011,87.249 89.662,87.249 91.821,85.09 R8.1
NetR9_1: R9.1 U3.17 | length 8.8
  Bottom Layer w0.3: U3.17 85.598,89.281 85.598,85.598 88.011,85.598 R9.1
NetR10_1: R10.1 U3.16 | length 7.6
  Bottom Layer w0.3: U3.16 82.931,83.058 82.957,83.084 R10.1
NetR11_1: R11.1 U3.15 | length 6.3
  Bottom Layer w0.3: R11.1 U3.15
NetR12_1: R12.1 U4.19 | length 9.5
  Bottom Layer w0.3: U4.19 93.726,61.087 95.504,61.087 R12.1
NetR13_1: R13.1 U4.18 | length 8.9
  Bottom Layer w0.3: U4.18 87.884,62.23 89.535,62.23 91.694,60.071 R13.1
NetR14_1: R14.1 U4.17 | length 8.8
  Bottom Layer w0.3: U4.17 85.471,64.262 85.471,60.579 87.884,60.579 R14.1
NetR15_1: R15.1 U4.16 | length 7.6
  Bottom Layer w0.3: U4.16 82.804,58.039 82.83,58.065 R15.1
NetR16_1: R16.1 U4.15 | length 6.3
  Bottom Layer w0.3: R16.1 U4.15
NetR17_1: R17.1 U5.19 | length 9.5
  Bottom Layer w0.3: U5.19 93.726,37.338 95.504,37.338 R17.1
NetR18_1: R18.1 U5.18 | length 8.9
  Bottom Layer w0.3: U5.18 87.884,38.481 89.535,38.481 91.694,36.322 R18.1
NetR19_1: R19.1 U5.17 | length 8.8
  Bottom Layer w0.3: U5.17 85.471,40.513 85.471,36.83 87.884,36.83 R19.1
NetR20_1: R20.1 U5.16 | length 7.6
  Bottom Layer w0.3: U5.16 82.804,34.29 82.83,34.316 R20.1
NetR21_1: R21.1 U5.15 | length 6.3
  Bottom Layer w0.3: R21.1 U5.15
NetR22_1: R22.1 U6.19 | length 9.5
  Bottom Layer w0.3: U6.19@90.424,16.637 93.726,13.335 95.504,13.335 R22.1
NetR23_1: R23.1 U6.18 | length 8.7
  Bottom Layer w0.3: U6.18 87.884,14.478 89.535,14.478 91.694,12.319 R23.1
NetR24_1: R24.1 U6.17 | length 8.8
  Bottom Layer w0.3: U6.17@85.344,16.637 85.471,16.51 85.471,12.827 87.884,12.827 R24.1
NetR25_1: R25.1 U6.16 | length 7.5
  Bottom Layer w0.3: U6.16 82.804,10.287 82.83,10.313 R25.1
NetR26_1: R26.1 U6.15 | length 6.2
  Bottom Layer w0.3: R26.1 U6.15
NetR28_1: R28.1 U1.16 | length 138.7
  Bottom Layer w0.3: U1.16 34.925,22.098 34.925,8.001 46.228,8.001 46.228,109.601 46.355,109.728 R28.1
NetR28_2: R28.2 T1.1 | length 7.5
  Bottom Layer w0.3: R28.2 63.627,109.728 T1.1@63.627,115.697
  Bottom Layer w1.2: T1.1@63.627,115.697 T1.1
NetR29_1: R29.1 U1.17 | length 114.3
  Bottom Layer w0.3: U1.17 33.655,19.558 33.655,6.35 47.625,6.35 47.625,84.455 R29.1
NetR29_2: R29.2 T2.1 | length 7.7
  Bottom Layer w0.3: R29.2@62.357,84.455 63.881,84.455 T2.1@63.881,90.678
NetR30_1: R30.1 U1.18 | length 89.2
  Bottom Layer w0.3: U1.18 32.258,17.018 32.385,16.891 32.385,5.207 49.022,5.207 49.022,59.69 R30.1
NetR30_2: R30.2 T3.1 | length 7.4
  Bottom Layer w0.3: R30.2@62.23,59.817 63.754,59.817 T3.1@63.754,65.659
NetR31_1: R31.1 U1.19 | length 65.7
  Bottom Layer w0.3: U1.19 31.115,14.478 31.115,3.81 50.419,3.81 50.419,35.814 R31.1
NetR31_2: R31.2 T4.1 | length 7.6
  Bottom Layer w0.3: R31.2 63.754,35.814 T4.1@63.754,41.91
NetR32_1: R32.1 U1.20 | length 41.4
  Bottom Layer w0.3: U1.20 29.083,2.794 52.07,2.794 R32.1
NetR32_2: R32.2 T5.1 | length 7.5
  Bottom Layer w0.3: R32.2 63.881,12.065 T5.1@63.881,17.907
NetR33_2: R33.2 U8.1 W6.1 | length 13.2
  Top Layer w0.3: R33.2 34.392,73.406 34.544,73.254 W6.1
  Bottom Layer w0.3: U8.1 28.783,68.626 32.533,68.626 33.757,69.85 W6.1
NetR34_1: R34.1 U8.14 | length 12.5
  Bottom Layer w0.3: R34.1 24.502,111.887 26.208,110.181 26.208,104.221 U8.14
NetR35_1: R35.1 U8.4 U8.15 | length 49.8
  Top Layer w0.3: R35.1 26.208,116.286 26.208,107.412 25.497,106.701 24.786,106.701 U8.15 26.03,96.779 26.03,78.999 U8.4
NetR39_1: R39.1 U8.3 | length 12.5
  Bottom Layer w0.3: U8.3 28.621,74.976 33.193,74.976 R39.1
NetS2_1: S2.1 U1.3 | length 35.7
  Bottom Layer w0.3: S2.1 5.497,73.497 8.255,70.739 11.303,70.739 13.97,68.072 13.97,60.549 23.652,60.549 U1.3
NetU1_21: U1.21 U2.1 U3.1 U4.1 U5.1 U6.1 | length 169.8
  Top Layer w0.3: U1.21 44.323,8.509 73.984,8.509 73.984,19.558 92.837,19.558 92.837,24.003 U6.1 92.964,38.227 91.694,39.497 91.694,46.99 U5.1 92.964,61.722 91.694,62.992 91.694,70.739 U4.1 92.964,86.995 91.821,88.138 91.821,95.758 U3.1 93.091,111.633 91.567,113.157 91.567,120.777 U2.1
NetU1_22: U1.22 U6.11 | length 27.8
  Top Layer w0.3: U1.22 70.104,14.478 U6.11
NetU1_23: U1.23 U5.11 | length 49.4
  Top Layer w0.3: U1.23 59.055,17.018 59.055,29.21 70.104,29.21 U5.11
NetU1_24: U1.24 U4.11 | length 70.6
  Top Layer w0.3: U1.24 57.785,19.558 57.785,53.086 70.104,53.086 U4.11
NetU1_25: U1.25 U3.11 | length 93.2
  Top Layer w0.3: U1.25 56.515,22.098 56.515,76.835 70.231,76.835 U3.11
NetU1_26: U1.26 U2.11 | length 115.4
  Top Layer w0.3: U1.26 55.245,24.638 55.245,102.235 69.977,102.235 U2.11
NetU1_36: U1.36 U2.6 U3.6 U4.6 U5.6 U6.6 | length 221.1
  Top Layer w0.3: U1.36 50.8,50.038 50.8,127.635 80.137,127.635 U2.6 78.937,120.847 78.937,98.482 U3.6 79.121,95.758 79.121,73.152 U4.6 78.994,70.739 78.994,49.53 U5.6 78.994,46.99 78.994,25.4 U6.6
NetU1_37: U1.37 U2.5 U3.5 U4.5 U5.5 U6.5 | length 223.8
  Top Layer w0.3: U1.37 49.403,52.578 49.403,128.905 82.804,128.905 82.804,122.174 U2.5 82.677,121.977 81.477,120.777 81.477,98.482 U3.5 81.661,95.758 81.661,73.152 U4.5 81.534,70.739 81.534,49.53 U5.5 81.534,46.99 81.534,25.4 U6.5
NetU1_38: U1.38 U2.4 U3.4 U4.4 U5.4 U6.4 | length 226.4
  Top Layer w0.3: U1.38 47.625,55.118 47.625,130.175 85.09,130.175 85.09,122.174 U2.4 85.02,122.047 83.877,120.904 83.877,113.735 85.471,112.141 U3.4 84.201,95.758 84.201,87.63 85.344,86.487 U4.4 84.074,70.739 84.074,62.103 85.344,60.833 U5.4 84.074,46.99 84.074,38.735 85.344,37.465 U6.4
NetU1_39: U1.39 U2.3 U3.3 U4.3 U5.3 U6.3 | length 228.6
  Top Layer w0.3: U1.39 46.355,57.658 46.355,131.445 87.757,131.445 U2.3 ; U2.3@87.757,121.92 86.557,120.72 86.557,98.482 U3.3 86.741,95.758 86.741,73.152 U4.3 86.614,70.739 86.614,49.53 U5.3 86.614,46.99 86.614,25.4 U6.3
NetU1_40: U1.40 U2.2 U3.2 U4.2 U5.2 U6.2 | length 231.3
  Top Layer w0.3: U1.40 44.323,132.715 90.17,132.715 90.17,122.174 U2.2 89.027,120.777 89.027,113.637 90.467,112.197 90.467,97.112 U3.2 89.281,95.758 89.281,87.63 90.424,86.487 U4.2 89.154,70.739 89.154,62.103 90.424,60.833 U5.2 89.154,46.99 89.154,38.354 90.424,37.084 U6.2
NetU8_25: U8.25 W5.2 | length 6.9
  Bottom Layer w0.3: W5.2 16.637,73.152 U8.25
VCC: C5.2 C6.2 C7.2 C8.2 C9.2 C10.2 R27.1 U1.10 U1.30 U1.32 U2.20 U3.20 U4.20 U5.20 U6.20 W1.2 W2.2 | length 386.5
  Top Layer w0.3: R27.1 18.542,34.671 18.542,37.338 W2.2 ; U1.30 41.656,34.798 41.656,39.751 41.783,39.878 U1.32 ; 96.52,114.427 C5.2 ; C9.2 96.647,16.764 96.901,16.51 ; 96.647,40.64 C8.2 ; C7.2 96.647,64.516 96.774,64.389 ; 96.901,89.408 C6.2
  Top Layer w0.7: U2.20 96.52,114.427 v3(103.251,114.427) ; U6.20 96.901,16.51 103.251,16.51 ; U5.20 96.647,40.64 103.251,40.64 ; U4.20 96.774,64.389 103.251,64.389 ; U3.20 96.901,89.408 103.251,89.408
  Top Layer w1.2: W2.2 C10.2 U1.10 37.973,37.338 ; 41.402,37.338 37.973,37.338 ; v3@103.251,114.046 103.251,89.408 103.251,64.389 103.251,40.64 103.251,16.51 103.251,3.937 37.973,3.937 37.973,37.338
  Bottom Layer w1.2: W1.2@41.021,126.492 103.251,126.492 v3(103.251,114.427)
pads on no net: J2.5 J2.6 P1.2 P1.3 U1.1 U1.2 U1.4 U1.5 U1.14 U1.15 U1.27 U1.28 U1.29 U1.33 U1.34 U1.35 U2.12 U2.13 U2.14 U3.12 U3.13 U3.14 U4.12 U4.13 U4.14 U5.12 U5.13 U5.14 U6.12 U6.13 U6.14 U8.5 U8.6 U8.11 U8.12 U8.13 U8.21 U8.26 U8.27 U8.28
copper on no net: | length 0.7
  Bottom Layer w0.3: 18.542,46.355 19.05,46.863
  other v1: 3.429,3.429 114.046,3.429 3.429,130.937 114.046,130.937
  other v2: 7.747,54.158 7.747,61.158 7.874,67.747 7.874,74.747

## Keep-outs
Keep-Out Layer:
  lines w0.3: 0,0 117.4,0 117.4,134.366 0,134.366 0,0

## Text inside footprints (layer, text, board x,y; h text height)
P1: Top Overlay "10" at 19.558,58.547 h1.27 r90; Top Overlay "9" at 22.098,58.547 h1.27 r90; Top Overlay "1" at 22.098,44.831 h1.27 r90; Top Overlay "2" at 19.558,44.323 h1.27 r90
T1: Top Overlay "1" at 67.579,115.574 h1.5 r90; Top Overlay "2" at 67.579,117.864 h1.5 r90; Top Overlay "3" at 67.579,120.404 h1.5 r90
T2: Top Overlay "1" at 67.833,90.555 h1.5 r90; Top Overlay "2" at 67.833,92.845 h1.5 r90; Top Overlay "3" at 67.833,95.385 h1.5 r90
T3: Top Overlay "1" at 67.706,65.536 h1.5 r90; Top Overlay "2" at 67.706,67.826 h1.5 r90; Top Overlay "3" at 67.706,70.366 h1.5 r90
T4: Top Overlay "1" at 67.706,41.787 h1.5 r90; Top Overlay "2" at 67.706,44.077 h1.5 r90; Top Overlay "3" at 67.706,46.617 h1.5 r90
T5: Top Overlay "1" at 67.706,17.784 h1.5 r90; Top Overlay "2" at 67.706,20.074 h1.5 r90; Top Overlay "3" at 67.706,22.614 h1.5 r90
U7: Top Overlay "1" at 16.653,17.522 h1.5 r270; Top Overlay "2" at 16.653,15.232 h1.5 r270; Top Overlay "3" at 16.653,12.692 h1.5 r270